# Altium PCB PCB - Copy.PcbDoc
Units mil, origin at the board's own origin, x right, y up, seen from the top; angles counter-clockwise.
Board outline 6023.62 x 2275.46 mil, 2 copper layers (Top Layer, Bottom Layer); 31 components, 24 nets, 110 pads, 29 vias.
Unrouted connection lines stored in the file: 18.
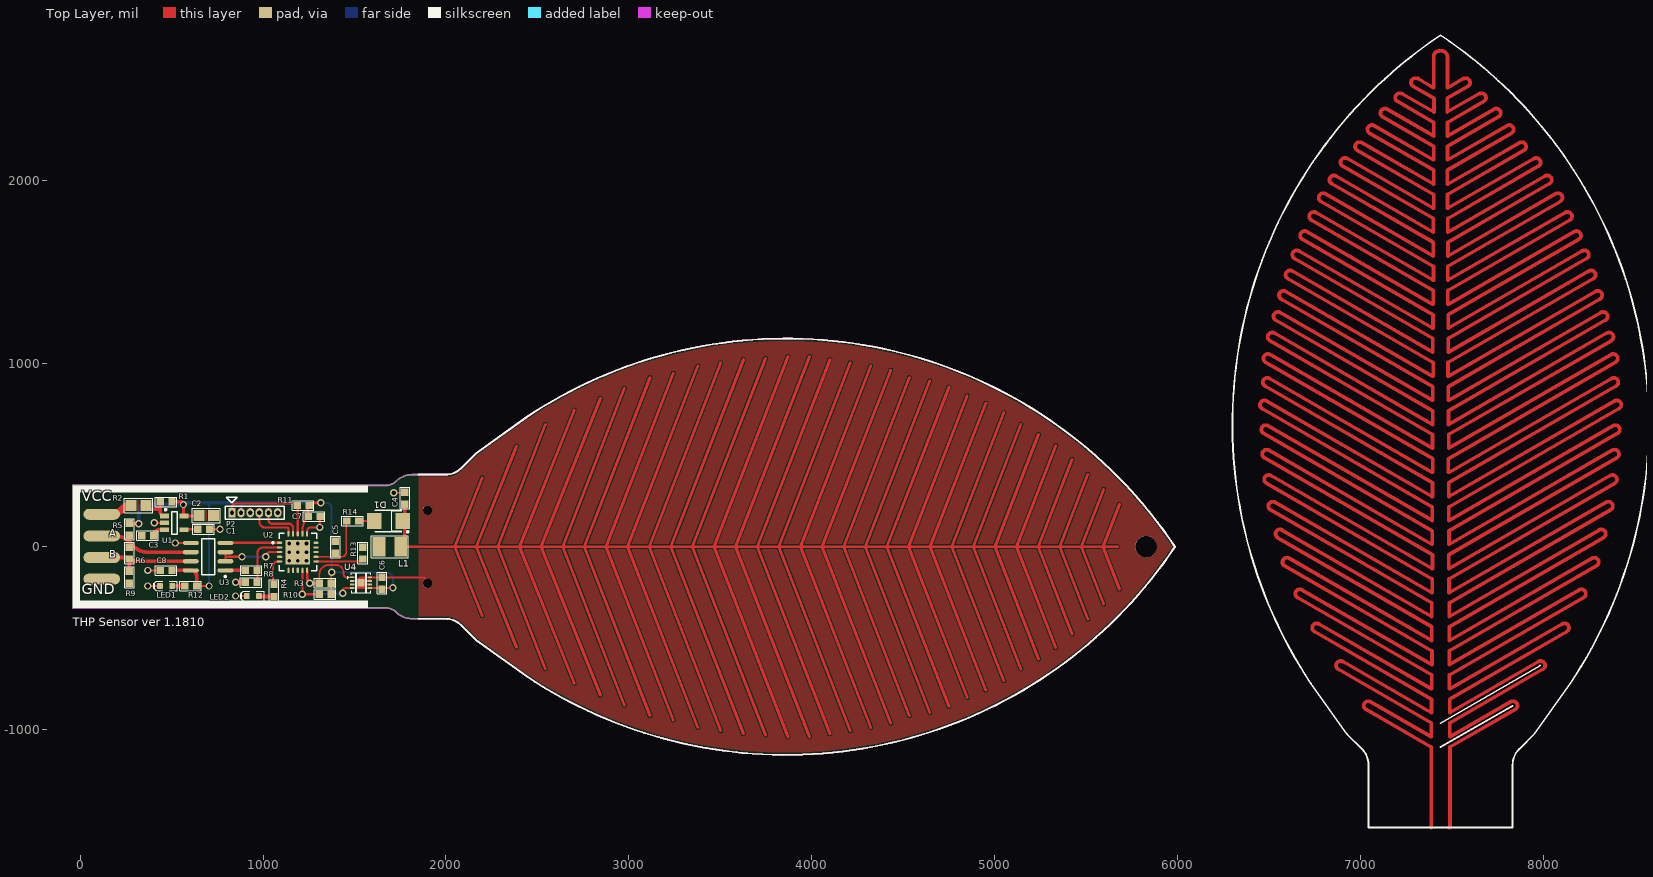
[diagram p0: Top Layer view]
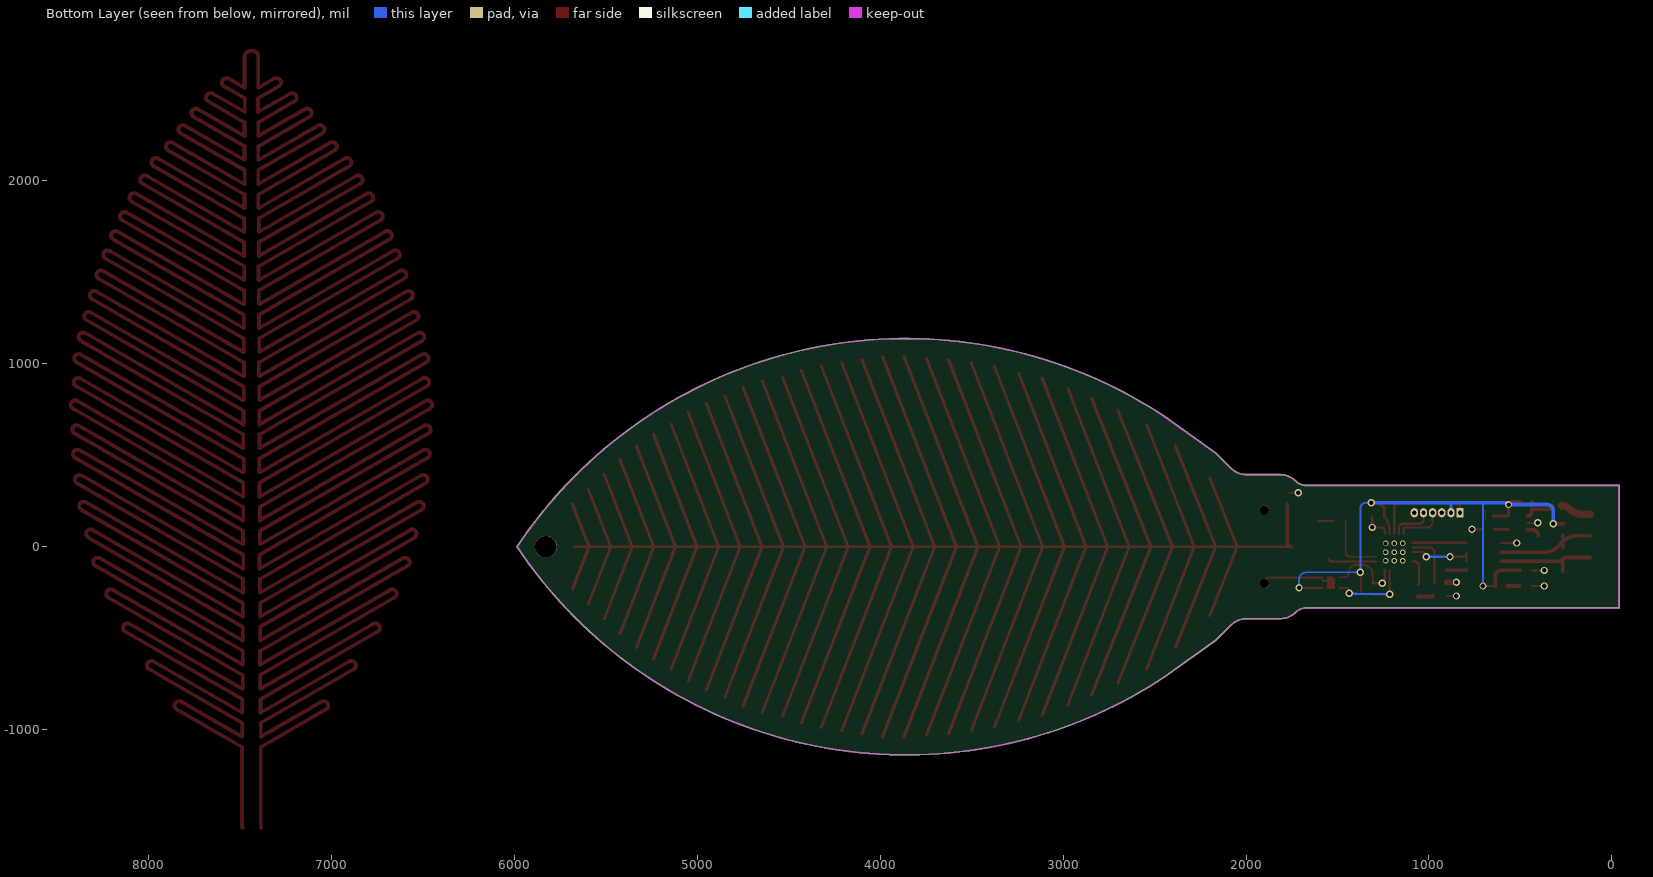
[diagram p1: Bottom Layer view, seen from below]

## Layer stack, top to bottom
Top Solder: solder mask 0.4, Solder Resist, Dk 3.5
Top Layer: signal copper 1.4
Dielectric1: dielectric 12.6, FR-4, Dk 4.8
Bottom Layer: signal copper 1.4
Bottom Solder: solder mask 0.4, Solder Resist, Dk 3.5

## Board outline
1576.71,-334.65 1671.13,-334.65 cw(c1671.13,-415.56) 1728.35,-358.35 ccw(c1813.7,-272.99) 1813.7,-393.7 1997.24,-393.7 cw(c1997.24,-514.41) 2082.6,-429.06 2165.35,-511.81 2440.94,-708.66 ccw(c3858.27,1417.32) 5984.25,0 ccw(c3858.27,-1417.32) 2440.94,708.66 2165.35,511.81 2082.6,429.06 cw(c1997.24,514.41) 1997.24,393.7 1813.7,393.7 ccw(c1813.7,272.99) 1728.35,358.35 cw(c1671.13,415.56) 1671.13,334.65 -39.37,334.65 -39.37,-334.65

## Design rules (kind name [scope] priority, off if disabled: settings)
Clearance [All] p1: gap=7 ignorepadtopadclearanceinfootprint=FALSE
ComponentClearance [All] p1 off: gap=10 collisioncheckmode=3 verticalgap=10 showdistances=FALSE
PlaneConnect [All] p1: planeconnectstyle=Direct reliefexpansion=20 reliefentries=4 reliefconductorwidth=10 reliefairgap=10
PolygonConnect [All] p1: connectstyle=Direct reliefconductorwidth=10 reliefentries=4 polygonreliefangle="90 Angle" airgapwidth=10
RoutingVias [All] p1: holewidth=25 width=40 viastyle="Through Hole" minholewidth=20 minwidth=35 maxholewidth=28 maxwidth=50
SolderMaskExpansion [All] p1: expansion=4
Width [All] p1: maxlimit=40 minlimit=10 preferedwidth=10
28 further rules are at their usual default settings.

## Classes and differential pairs
component class Sensor: C4 C5 C6 D1 L1 R13 R14 U4
component class MCU: C7 LED2 P2 R3 R4 R10 R11 U2
component class PowerSupply: C1 C2 C3 LED1 R1 R2 R12 U1
component class RS485: C8 R5 R6 R7 R8 R9 U3

## Components (designator, comment, footprint, x,y, rotation, side; value= is the part's Value field where it differs from the comment)
C1 "100nF" 0603 675,95.35 r180 top
C2 "2.2uF" 0805 690,170.35 r180 top value=100nF
C3 "100nF" 0603 370,60.35 r0 top
C4 "1nF" 0603 1775,265 r270 top
C5 "10nF" 0603 1395,-2.44 r270 top
C6 "100nF" 0603 1650,-200 r270 top
C7 "100nF" 0603 1280,165.35 r0 top
C8 "100nF" 0603 470,-129.65 r180 top
D1 "1N4148" D1810 1685,140 r180 top
L1 "1uH" 1210 1692.91,0 r0 top value=1.5µH
LED1 "RED" LED-0603-RED 470,-214.65 r180 top
LED2 "White" LED-0603-RED 945,-269.65 r180 top
P2 "Header 6" MHDR1X6 830,185.35 r0 top
R1 "dnp" 0603 470,245.35 r180 top value=1M
R2 "RTCC" 0805 319.25,225.04 r0 top
R3 "10k" 0603 1340,-199.65 r0 top value=1K
R4 "1k" 0603 1060,-239.65 r270 top value=1K
R5 "100k" 0603 269.69,95.04 r270 top value=4K7
R6 "dnp" 0603 269.69,-34.96 r270 top value=4K7
R7 "1k" 0603 935,-129.65 r180 top value=1M
R8 "dnp" 0603 935,-194.65 r0 top value=1M
R9 "100k" 0603 269.69,-167.52 r270 top value=4K7
R10 "10k" 0603 1340,-260 r0 top value=1K
R11 "10k" 0603 1220,225.35 r0 top value=1K
R12 "10k" 0603 605,-214.65 r0 top value=1M
R13 "150 1%" 0603 1545,-35 r90 top value=1M
R14 "1M" 0603 1490,140 r0 top
U1 "MIC5319-3.3" sot23-5 515,130.35 r270 top
U2 "PIC24F16KL401-I/MQ" QFN-MQ20_N 1190,-29.65 r0 top
U3 "ISL83485IBZ" SO8 700,-54.65 r180 top
U4 "SHT30" QFN50P250X250X100_HS-9N 1535.43,-196.85 r0 top

## Footprints (in the part's own frame and the unit in brackets; to place one, negate y for a bottom-side part, rotate by r counter-clockwise, add the part's x,y. Pads: shape width x height; smd on the part's side, far side on the other; paste and mask are expansions set on the pad)
0603 [mil]
  rect 40x40 smd: 1(-32.56,0) 2(32.56,0)
  silkscreen extent -59,-26 58,26, body extent -34,-19 34,19, height 51
0805 [mil]
  rect 60x60 smd: 1(-40.43,0) 2(40.43,0)
  Top Layer lines w0: 0,27 0,28 0,-28
  silkscreen extent -77,-40 77,40, body extent -42,-28 42,28, height 28
1210 [mil]
  rect 70x105 smd: 1(-59.75,0) 2(59.75,0)
  Top Layer pour cut-out: -23,53 22,53 22,-53 -23,-53
  silkscreen extent -101,-60 102,60, body extent -66,-52 66,52, height 35
D1810 [mil]
  rect 78.74x86.61 smd: 1(78,-0.5) 2(-78,0.5)
  silkscreen extent -111,-60 73,63, body extent -90,-54 95,52, height 35
LED-0603-RED [mm]
  round 0.254 on Mech15: 0(0,0)
  rrect25% 0.8x0.8 smd: A(-0.85,0) K(0.85,0)
  Top Layer pour cut-out: -0.5,0.5 0.5,0.5 0.5,-0.5 -0.5,-0.5
  silkscreen extent -1.55,-0.67 1.68,0.67, body extent -0.8,-0.4 0.8,0.4, height 0.75
MHDR1X6 [mil] "Connector; Header; 6 Position"
  rect 40x50 hole 23.62: 1(0,0)
  oval 40x50 hole 23.62: 2(50,0) 3(100,0) 4(150,0) 5(200,0) 6(250,0)
  silkscreen extent -35,-35 285,35
QFN50P250X250X100_HS-9N [mm] "QFN, 8-Leads, Body 2.50x2.50mm, Pitch 0.50mm, Thermal Pad 1.80x1.10mm, IPC Medium Density"
  rect 1x1 smd paste+0.1: 0(0,0)
  rect 0.65x0.25 smd paste+0.1: 1(-1.2,0.75) 2(-1.2,0.25) 3(-1.2,-0.25) 4(-1.2,-0.75) 5(1.2,-0.75) 6(1.2,-0.25) 7(1.2,0.25) 8(1.2,0.75)
  Top Layer region: 0.5,-0.85 0.5,0.85 -0.175,0.85 -0.5,0.525 -0.5,-0.85
  silkscreen extent -1.88,-1.37 1.38,1.38, body extent -1.3,-1.3 1.3,1.3, height 1
QFN-MQ20_N [mm] "QFN, 20-Leads, Body 5x5 mm, Pitch 0.65mm, IPC Medium Density"
  oval 0.75x0.3 smd: 1(-2.525,1.3) 2(-2.525,0.65) 3(-2.525,0) 4(-2.525,-0.65) 5(-2.525,-1.3) 11(2.525,-1.3) 12(2.525,-0.65) 13(2.525,0) 14(2.525,0.65) 15(2.525,1.3)
  oval 0.3x0.75 smd: 6(-1.3,-2.525) 7(-0.65,-2.525) 8(0,-2.525) 9(0.65,-2.525) 10(1.3,-2.525) 16(1.3,2.525) 17(0.65,2.525) 18(0,2.525) 19(-0.65,2.525) 20(-1.3,2.525)
  rect 3.4x3.4 smd: 21(0,0)
  silkscreen extent -3.57,-2.6 2.6,2.6, body extent -2.58,-2.58 2.58,2.58, height 1
SO8 [mm]
  oval 2.2x0.6 smd: 1(-2.4,1.905) 2(-2.4,0.635) 3(-2.4,-0.635) 4(-2.4,-1.905) 5(2.4,-1.905) 6(2.4,-0.635) 7(2.4,0.635) 8(2.4,1.905)
  silkscreen extent -2.53,-2.5 0.9,2.88, body extent -2,-2.5 2,2.5, height 1.75
sot23-5 [mm]
  rect 0.65x1.25 smd: 1(-0.95,-1.327) 2(0,-1.327) 3(0.95,-1.327) 4(0.95,1.327) 5(-0.95,1.327)
  silkscreen extent -1.95,-1.32 1.55,0.38, body extent -1.55,-0.9 1.55,0.9, height 1.45

## Part data
C1 C2 C3 C7 C8: library part "Cap Semi", "Capacitor (Semiconductor SIM Model)", LatestRevisionDate=29-May-2009, LatestRevisionNote="IPC-7351 Footprint Added.", PackageDescription="Chip Capacitor", PackageReference=C1206, Published=8-Jun-2000, Publisher="Altium Limited"
C4 C5 C6: library part C_0402, Manufacturer=AVX, Manufacturer Part Number=04023A101JAT2A, Supplier Part Number 1=1327622, ComponentLink1Description=http://www.avx.com/docs/Catalogs/ccog.pdf, ComponentLink1URL=http://www.avx.com/docs/Catalogs/ccog.pdf, Pricing 1="10=0,129, 100=0,099, 500=0,067, 1000=0,056, 5000=0,043 (EUR)", RoHS=YES, Stock 1=84696, Supplier 1=Farnell
D1: library part Diode, "Default Diode", Code_JEDEC=DO-214-AB, LatestRevisionDate=17-Jul-2002, LatestRevisionNote="Re-released for DXP Platform.", PackageDescription="DO-214-AB/SMC; 2 C-Bend Leads; Body 7.9 x 5.9 mm, inc. leads (LxW)", PackageReference=SMC, PackageVersion=Sep-1996, Published=8-Jun-2000, Publisher="Altium Limited"
L1: library part Inductor, "Inductor", Code_IEC=1005, Code_JEITA=0402, LatestRevisionDate=29-May-2009, LatestRevisionNote="IPC-7351 Footprint Added.", PackageDescription="Chip Inductor", PackageReference=0402-A, Published=8-Jun-2000, Publisher="Altium Limited"
LED1 LED2: library part SMD_LED_0805
P2: "Header, 6-Pin", LatestRevisionDate=17-Jul-2002, LatestRevisionNote="Re-released for DXP Platform.", Publisher="Altium Limited"
R1 R5 R6 R7 R8 R9 R12 R13 R14: library part "Res Semi", "Semiconductor Resistor", LatestRevisionDate=17-Jul-2002, LatestRevisionNote="Re-released for DXP Platform.", PackageReference=AXIAL-0.5, Published=8-Jun-2000, Publisher="Altium Limited"
R2: library part Ferritbeat, Manufacturer=MURATA, Manufacturer Part Number=BLM18EG471SN1D, Supplier Part Number 1=1515722, ComponentLink1Description=http://www.farnell.com/datasheets/5169.pdf, ComponentLink1URL=http://www.farnell.com/datasheets/5169.pdf, Pricing 1="5=0,196, 50=0,17, 100=0,14, 250=0,112, 500=0,101, 2000=0,092 (EUR)", RoHS=YES, Stock 1=11384, Supplier 1=Farnell
R3 R4 R10 R11: library part Res1, "Resistor", LatestRevisionDate=17-Jul-2002, LatestRevisionNote="Re-released for DXP Platform.", PackageReference=AXIAL-0.3, Published=8-Jun-2000, Publisher="Altium Limited"
U1: library part MIC5305
U2: library part PIC24F04KA201T-I/MQ, "General Purpose 16-Bit Flash Microcontroller with nanoWatt XLP Technology, 4KB Flash, 512 bytes SRAM, 20-Pin QFN, Industrial Temperature, Tape and Reel", Supplier Part Number 1=PIC24F04KA201T-I/MQ-ND, ComponentLink1Description=Datasheet, ComponentLink1URL=http://ww1.microchip.com/downloads/en/DeviceDoc/39937b.pdf, ComponentLink2Description="Packaging Specification", ComponentLink2URL=http://www.microchip.com/stellent/groups/techpub_sg/documents/packagingspec/en012702.pdf, ComponentLink3Description="Microchip.com Home", ComponentLink3URL=http://www.microchip.com/, DatasheetVersion="revB, May-2009", FirstPublished=2-Dec-2009, PackageDescription="20-Lead Plastic Quad Flat, No Lead Package (MQ) - 5x5x0.9 mm Body [QFN]", PackageReference=QFN-MQ20, PackageVersion="revBB, Aug-2009", Publisher="Altium Limited", Supplier 1=Digi-Key, Supplier 2=Newark, Supplier Part Number 2=08R2010
U3: library part SN75176AD, "Differential Bus Transceiver", Code_IPC=SOIC127P600-8, ComponentLink1Description="Manufacturer Link", ComponentLink1URL=http://www.ti.com/, ComponentLink2Description=Datasheet, ComponentLink2URL=http://www-s.ti.com/sc/ds/sn75176a.pdf, DatasheetVersion=Aug-1989, LatestRevisionDate=13-Apr-2006, LatestRevisionNote="IPC-7351 Footprint Added.", Note="Receiver Hysteresis of 50mV Typical", PackageDescription="8-Pin Small Outline Integrated Circuit 1.27 mm Pitch", PackageReference=D008, PackageVersion=Jan-1998, Published=15-May-2002, Publisher="Altium Limited"
U4: library part SHT3x

## Free pads (board coordinates)
  oval 200x60 smd paste+3.94: 1(118.11,-177.17) 1(118.11,-59.06) 1(118.11,59.06) 1(118.11,177.17)
  round 51.18 hole 51.18: ""(1900,-200) ""(1900,200)
  round 118.11 hole 118.11: ""(5826.77,0)

## Via types
v1: diameter 40, hole 25, Top Layer to Bottom Layer, 20 vias
v2: diameter 30, hole 20, Top Layer to Bottom Layer, tented top, 9 vias

## Nets (pads, with @x,y where several pads share a name; then routed paths per layer and width w, separated by ;. In a path a pad name is that pad's centre, name@x,y a point inside that pad or via, vN(x,y) a via of type N, cw(c..) or ccw(c..) an arc to the next point about the centre after c; other vN are vias at no path point)
GND: C1.1 C2.1 C3.1 C4.1 C5.1 C6.1 C7.2 C8.2 LED1.K LED2.K P2.3 pad. pad.1@118.11,-177.17 R8.1 R9.2 U1.2 U2.16 U2.21 U3.5 U4.0 U4.7 U4.8 | length 1018
  Top Layer w11: v1(370,-214.65) LED1.K ; v1(370,-129.65) 370,-134.65 cw(c375,-134.65) 375,-129.65 C8.2 ; v1(405,130.35) U1.2 ; v1(520,20.35) U3.5 ; C1.1 v1(765,95.35) ; v1(850,-269.65) LED2.K@901.54,-269.65 ; U2.16 1241.18,86.54 cw(c1260,86.54) 1260,105.35 v1(1310,105.35) ; v1@1310,115.35 1310,162.8 cw(c1312.56,162.8) C7.2 ; U4.0 cw(c1545.28,-196.85) 1545.28,-187.01 U4.7 U4.8 1867.32,-167.32 cw(c1867.32,-200) pad.@1900,-200
  Top Layer w30: v1(850,-194.65) R8.1
  Bottom Layer w11: v2(1237.24,-29.65) cw(c1246.89,-29.65) v2@1246.89,-20
  other v2: 1142.76,-76.89 1190,-76.89 1237.24,-76.89 1142.76,-29.65 1190,-29.65 1142.76,17.6 1190,17.6 1237.24,17.6
LED_DEBUG: R4.1 U2.5 | length 154.5
  Top Layer w12: R4.1 cw(c1060,-202.09) 1055,-202.09 1055,-104.65 cw(c1078.82,-104.65) 1078.82,-80.83 U2.5
MCU_PGC: P2.5 U2.19 | length 230.9
  Top Layer w12: P2.5 1030,145.35 ccw(c1050,145.35) 1050,125.35 1140,125.35 cw(c1140,100.94) 1164.41,100.94 U2.19
MCU_PGD: P2.4 U2.20 | length 257.7
  Top Layer w12: P2.4 980,135.35 ccw(c1010,135.35) 1010,105.35 1130,105.35 cw(c1130,96.54) 1138.82,96.54 U2.20
MCU_RESET: P2.1 R11.1 U2.18 | length 561.6
  Top Layer w12: P2.1 830,215.35 cw(c850,215.35) 850,235.35 1177.44,235.35 cw(c1177.44,225.35) R11.1 cw(c1187.44,222.8) 1190,222.8 U2.18
NetC1_2: C1.2 U1.4 | length 76.6
  Top Layer w15: U1.4 cw(c569.65,92.95) 569.65,95.35 C1.2
NetC3_2: C3.2 R1.2 R2.2 U1.1 U1.3 | length 268.6
  Top Layer w20: R2.2@340,205.35 437.44,205.35 ; C3.2 cw(c435.16,60.35) 435.16,92.95 U1.3 ; R1.2 437.44,205.35 ; 437.44,205.35 437.44,193.07 ccw(c462.76,193.07) U1.1@462.49,167.76 ; U1.1@462.49,167.76 ccw(c462.76,193.07) U1.1 U1.1@462.49,167.76
NetD1_1: D1.1 R14.2 | length 84.9
  Top Layer w10: R14.2 1522.56,140.5 D1.1
NetL1_1: L1.1 R13.2
NetLED1_A: LED1.A R12.1 | length 69
  Top Layer w20: LED1.A R12.1
NetLED2_A: LED2.A R4.2 | length 83
  Top Layer w20: LED2.A ccw(c981.02,-269.65) 981.02,-272.2 R4.2
NetR7_2: R7.2 U3.1 | length 108
  Top Layer w20: U3.1 R7.2
PulseOut: R13.1 U2.11 | length 263.2
  Top Layer w12: U2.11 1531.73,-80.83 ccw(c1531.73,-67.56) R13.1
RS485_A: pad.1@118.11,59.06 R5.2 R6.1 U3.6 | length 580.4
  Top Layer w20: pad.1@118.11,59.06 194.8,59.06 cw(c194.8,-40.94) 265.51,29.77 269.69,25.59 ; R6.1 269.69,25.59 ; R5.2 269.69,25.59 ; U3.6 366.34,-29.65 cw(c366.34,70.35) 295.63,-0.36 269.69,25.59
RS485_B: pad.1@118.11,-59.06 R6.2 R9.1 U3.7 | length 560.3
  Top Layer w20: pad.1@118.11,-59.06 249.25,-59.06 cw(c249.25,-87.96) R6.2 ; R9.1 R6.2 ; U3.7 298.96,-79.65 cw(c298.96,-38.24) R6.2
SCL: R10.1 U2.9 U4.4 | length 499
  Top Layer w10: v1(1435,-255) 1435,-240 cw(c1448.62,-240) 1448.62,-226.38 U4.4
  Top Layer w12: v1(1215,-259.65) v1@1215.59,-259.65 ; U2.9 v1@1215.59,-259.65 ; R10.1@1307.44,-259.65 v1@1215.59,-259.65
  Bottom Layer w12: v1(1215,-259.65) 1240.16,-259.65 1394.04,-257.21 1415.03,-256.88
SDA: R3.1 U2.10 U4.1 | length 433.7
  Top Layer w10: R3.1 1307.44,-151.7 cw(c1359.14,-151.7) 1359.14,-100 1400,-100 cw(c1400,-140) 1440,-140 1440,-150 ccw(c1457.32,-150) 1457.32,-167.32 U4.1
  Top Layer w12: U2.10 1241.18,-175.83 ccw(c1260,-175.83) v1@1256.13,-194.24 ; v1(1255,-199.65) R3.1
  Bottom Layer w12: v1@1250,-204.65 cw(c1255,-204.65) v1(1255,-199.65)
SENSOR_DR: U2.3 U3.2 U3.3 | length 359.9
  Top Layer w12: U3.2 U3.3 ; 795,-54.65 v1(885,-54.65) ; v1(1015,-54.65) cw(c1040,-54.65) 1040,-29.65 U2.3
  Bottom Layer w12: v1(885,-54.65) v1(1015,-54.65)
SENSOR_RX: U2.1 U3.4 | length 297.3
  Top Layer w12: U3.4 794.49,21.54 U2.1
SENSOR_TX: R7.1 R8.2 U2.2 | length 299.4
  Top Layer w12: R8.2 ccw(c967.56,-192.2) 970,-192.2 970,-34.65 cw(c1000.59,-34.65) 1000.59,-4.06 U2.2
SensorCap: C4.2 D1.2 L1.2 | length 56290.9
  Top Layer w15.75: L1.2 1752.81,0 2047.24,0 ; 2197.94,-376.73 2047.24,0 ; 2197.94,376.73 2047.24,0 ; 2385.28,-549.82 2165.35,0 ; 2385.28,549.82 2165.35,0 ; 2543.17,-667.81 2283.46,0 ; 2543.17,667.81 2283.46,0 ; 2700.24,-746.67 2401.57,0 ; 2700.24,746.67 2401.57,0 ; 2844.15,-811.16 2519.69,0 ; 2844.15,811.16 2519.69,0 ; 2974.34,-865.4 2637.8,0 ; 2974.34,865.4 2637.8,0 ; 3114.99,-923.35 2755.91,0 ; 3114.99,923.35 2755.91,0 ; 3242.33,-947.1 2874.02,0 ; 3242.33,947.1 2874.02,0 ; 3376.33,-987.95 2992.13,0 ; 3376.33,987.95 2992.13,0 ; 3501.09,-1005.05 3110.24,0 ; 3501.09,1005.05 3110.24,0 ; 3625.85,-1022.14 3228.35,0 ; 3625.85,1022.14 3228.35,0 ; 3746.54,-1028.79 3346.46,0 ; 3746.54,1028.79 3346.46,0 ; 3868.72,-1039.24 3464.57,0 ; 3868.72,1039.24 3464.57,0 ; 3986.83,-1039.24 3582.68,0 ; 3986.83,1039.24 3582.68,0 ; 4098.29,-1022.14 3700.79,0 ; 4098.29,1022.14 3700.79,0 ; 4209.75,-1005.05 3818.9,0 ; 4209.75,1005.05 3818.9,0 ; 4321.21,-987.95 3937.01,0 ; 4321.21,987.95 3937.01,0 ; 4430.08,-964.2 4055.12,0 ; 4430.08,964.2 4055.12,0 ; 4532.31,-923.35 4173.23,0 ; 4532.31,923.35 4173.23,0 ; 4643.77,-906.25 4291.34,0 ; 4643.77,906.25 4291.34,0 ; 4748.58,-872.05 4409.45,0 ; 4748.58,872.05 4409.45,0 ; 4848.22,-824.56 4527.56,0 ; 4848.22,824.56 4527.56,0 ; 4950.44,-783.71 4645.67,0 ; 4950.44,783.71 4645.67,0 ; 5048.61,-732.41 4763.78,0 ; 5048.61,732.41 4763.78,0 ; 5141.6,-667.81 4881.89,0 ; 5141.6,667.81 4881.89,0 ; 5238.65,-613.67 5000,0 ; 5238.65,613.67 5000,0 ; 5332.75,-551.92 5118.11,0 ; 5332.75,551.92 5118.11,0 ; 5421.67,-476.87 5236.22,0 ; 5421.67,476.87 5236.22,0 ; 5508.01,-395.18 5354.33,0 ; 5508.01,395.18 5354.33,0 ; 5594.35,-313.48 5472.44,0 ; 5594.35,313.48 5472.44,0 ; 5669.29,0 5590.55,0 ; 5680.69,-231.79 5590.55,0 ; 5680.69,231.79 5590.55,0 ; 2047.24,0 2165.35,0 ; 2165.35,0 2283.46,0 ; 2283.46,0 2401.57,0 ; 2401.57,0 2519.69,0 ; 2519.69,0 2637.8,0 ; 2637.8,0 2755.91,0 ; 2755.91,0 2874.02,0 ; 2874.02,0 2992.13,0 ; 2992.13,0 3110.24,0 ; 3110.24,0 3228.35,0 ; 3228.35,0 3346.46,0 ; 3346.46,0 3464.57,0 ; 3464.57,0 3582.68,0 ; 3582.68,0 3700.79,0 ; 3700.79,0 3818.9,0 ; 3818.9,0 3937.01,0 ; 3937.01,0 4055.12,0 ; 4055.12,0 4173.23,0 ; 4173.23,0 4291.34,0 ; 4291.34,0 4409.45,0 ; 4409.45,0 4527.56,0 ; 4527.56,0 4645.67,0 ; 4645.67,0 4763.78,0 ; 4763.78,0 4881.89,0 ; 4881.89,0 5000,0 ; 5000,0 5118.11,0 ; 5118.11,0 5236.22,0 ; 5236.22,0 5354.33,0 ; 5354.33,0 5472.44,0 ; 5472.44,0 5590.55,0
  Top Layer w20: L1.2 ccw(c1752.66,22.34) 1752.81,0 ccw(c1752.66,22.34) 1775,22.34 C4.2
SM_VoltageIn: C5.2 R14.1 U2.12 | length 351.4
  Top Layer w10: U2.12 1429.76,-55.24 ccw(c1429.76,-30) 1455,-30 1455,137.56 cw(c1457.44,137.56) R14.1
V+3.3: C2.2 C6.2 C7.1 C8.1 P2.2 R1.1 R3.2 R5.1 R10.2 R11.2 R12.2 U1.5 U2.17 U3.8 U4.5 | length 3451.8
  Top Layer w10: R12.2 637.56,-215 v1(705,-215) ; R10.2 R3.2 1372.56,-142.44 cw(c1375,-142.44) v1(1375,-140) ; U4.5 1708.62,-226.38 ccw(c1708.62,-225) v1(1710,-225)
  Top Layer w11: U2.17 1215.59,92.08 cw(c1315.59,92.08) 1244.88,162.79 C7.1
  Top Layer w15: v1(565,230.35) 565,175.51 570,170.51 cw(c567.24,170.51) U1.5 646.97,167.76 ccw(c646.97,170.35) C2.2 ; C7.1@1244.88,162.79 1244.88,206.82 cw(c1263.42,206.82) 1263.42,225.35 1278.42,240.35 v1(1315,240.35)
  Top Layer w20: R5.1@267.44,125.35 v1(320,125.35) ; C8.1 U3.8 cw(c605.51,-161.69) 637.56,-161.69 R12.2 ; R1.1 550,245.35 cw(c550,230.35) v1(565,230.35)
  Bottom Layer w10: v1(705,-215) 705,235.35 ; v1(1315,240.35) 1315,240 1345,240 cw(c1345,210) 1375,210 v1(1375,-140) 1670,-140 cw(c1670,-180) 1710,-180 v1(1710,-225)
  Bottom Layer w15: P2.2 880,240.35
  Bottom Layer w20: v1(320,125.35) 320,195.35 cw(c355,195.35) 355,230.35 v1(565,230.35) cw(c575,230.35) 575,240.35 710,240.35 ; 705,235.35 cw(c710,235.35) 710,240.35 ; v1@1300,240.35 880,240.35 710,240.35
V+IN: pad.1@118.11,177.17 R2.1 | length 173.5
  Top Layer w40: pad.1@118.11,177.17 163.24,177.17 ccw(c163.24,270.28) 229.08,204.44 cw(c278.82,154.7) R2.1
pads on no net: LED1.0 LED2.0 P2.6 U2.4 U2.6 U2.7 U2.8 U2.13 U2.14 U2.15 U4.2 U4.3 U4.6
copper on no net: | length 94866.1
  Top Layer w10: v1(1715,295) 1770,295
  Top Layer w20: 6459.87,754.77 7390.42,217.52 7390.42,142.54 ; 6460,755 cw(c6471.75,775.35) 6451.4,787.11 cw(c6473.05,774.61) 6485.55,796.26 ; 6487.13,795.03 7388.81,274.45 ; 6504.8,1049.97 ccw(c6492.3,1028.32) 6470.65,1040.82 ccw(c6491.01,1029.07) 6479.26,1008.71 7393.3,480.99 7393.3,406.01 ; 6510.85,1046.48 7391.69,537.93 7391.69,612.9 6502.76,1126.13 cw(c6514.52,1146.48) 6494.16,1158.23 cw(c6515.81,1145.73) 6528.31,1167.38 7390.08,669.84 ; 6544.42,49 7387.71,-437.87 7387.71,-512.85 6608.78,-63.14 ccw(c6596.28,-84.79) 6574.63,-72.29 ccw(c6594.99,-84.04) 6583.24,-104.4 7389.32,-569.79 7389.32,-644.77 6675.69,-235.08 ; 6545,50 cw(c6556.75,70.35) 6536.4,82.11 cw(c6558.05,69.61) 6570.55,91.26 ; 6569.97,90.26 7386.1,-380.94 ; 6679.08,-236.29 ccw(c6666.58,-257.94) 6644.93,-245.44 ccw(c6665.28,-257.19) 6653.53,-277.55 7387.88,-701.53 7387.88,-776.5 ; 6900.47,2080 cw(c6912.22,2100.35) 6891.87,2112.11 cw(c6913.52,2099.61) 6926.02,2121.26 7394.78,1850.62 ; 6902.28,2078.95 7396.39,1793.68 7396.39,1718.7 ; 7224.94,2475.21 ccw(c7212.44,2453.56) 7190.79,2466.06 ccw(c7211.15,2454.31) 7199.4,2433.95 7398.38,2319.07 7398.38,2244.09 ; 7227.67,2474.66 7399.82,2375.83 7399.82,2450.81 7285.91,2516.57 cw(c7297.66,2536.93) 7277.31,2548.68 cw(c7298.96,2536.18) 7311.46,2557.83 ; 7312.03,2558.8 7398.21,2507.74 7398.21,2678.21 cw(c7430,2678.21) 7430,2710 7440,2710 cw(c7440,2676.56) 7473.44,2676.56 7473.44,2507.74 7559.62,2558.8 ; 7384.11,-906.33 6901.52,-627.7 ccw(c6889.02,-649.35) 6867.37,-636.85 ccw(c6887.72,-648.6) 6875.97,-668.96 7385.72,-963.26 7385.72,-1038.24 7384.72,-1039.24 7052.95,-847.7 ccw(c7040.45,-869.35) 7018.8,-856.85 ccw(c7039.16,-868.6) 7027.41,-888.96 7384.28,-1095 7384.28,-1534.28 ccw(c7385,-1534.28) 7385,-1535 ; 7384.83,-776.33 6771.45,-422.19 ccw(c6758.95,-443.84) 6737.29,-431.34 ccw(c6757.65,-443.09) 6745.9,-463.45 7386.44,-833.26 7386.44,-908.24 ; 7386.82,-250.94 6531.49,242.89 ccw(c6518.99,221.24) 6497.34,233.74 ccw(c6517.69,221.99) 6505.94,201.63 7388.43,-307.87 7388.43,-382.85 ; 7388.09,144.45 6493.32,661.05 ccw(c6480.82,639.4) 6459.16,651.9 ccw(c6479.52,640.15) 6467.77,619.79 7389.7,87.52 7389.7,12.54 6498.22,527.23 ccw(c6485.72,505.58) 6464.07,518.08 ccw(c6484.43,506.33) 6472.68,485.97 7391.31,-44.4 7391.31,-119.38 ; 7388.26,-119.2 6508.94,388.47 ccw(c6496.44,366.82) 6474.79,379.32 ccw(c6495.15,367.57) 6483.39,347.22 7389.87,-176.14 7389.87,-251.11 ; 7390.25,406.19 6501.53,919.29 ccw(c6489.03,897.64) 6467.38,910.14 ccw(c6487.73,898.39) 6475.98,878.04 7391.86,349.25 7391.86,274.27 ; 7390.8,799.84 6559.65,1279.7 ccw(c6547.15,1258.05) 6525.5,1270.55 ccw(c6545.86,1258.8) 6534.1,1238.45 7392.41,742.9 7392.41,667.93 ; 7392.07,1195.23 6662.7,1616.33 ccw(c6650.2,1594.68) 6628.55,1607.18 ccw(c6648.91,1595.43) 6637.16,1575.07 7393.68,1138.29 7393.68,1063.31 6625.78,1506.66 ccw(c6613.28,1485.01) 6591.63,1497.51 ccw(c6611.98,1485.76) 6600.23,1465.4 7395.29,1006.38 7395.29,931.4 ; 7392.24,931.58 6589.76,1394.89 ccw(c6577.26,1373.24) 6555.61,1385.74 ccw(c6575.96,1373.99) 6564.21,1353.63 7393.85,874.64 7393.85,799.66 ; 7392.79,1325.23 6705.87,1721.82 ccw(c6693.37,1700.17) 6671.72,1712.67 ccw(c6692.08,1700.92) 6680.33,1680.56 7394.4,1268.29 7394.4,1193.31 ; 7394.06,1720.62 6865.33,2025.88 ccw(c6852.83,2004.23) 6831.18,2016.73 ccw(c6851.53,2004.98) 6839.78,1984.62 7395.67,1663.68 7395.67,1588.7 6806.91,1928.62 ccw(c6794.41,1906.97) 6772.76,1919.47 ccw(c6793.12,1907.72) 6781.37,1887.36 7397.28,1531.77 7397.28,1456.79 ; 7394.23,1456.97 6754.6,1826.26 ccw(c6742.1,1804.61) 6720.45,1817.11 ccw(c6740.8,1805.35) 6729.05,1785 7395.84,1400.03 7395.84,1325.05 ; 7396.05,2246.01 7144.47,2391.26 ccw(c7131.97,2369.61) 7110.32,2382.11 ccw(c7130.67,2370.35) 7118.92,2350 7397.66,2189.07 7397.66,2114.09 7073.48,2301.26 ccw(c7060.98,2279.61) 7039.33,2292.11 ccw(c7059.68,2280.35) 7047.93,2260 7399.27,2057.16 7399.27,1982.18 ; 7396.22,1982.35 7005.55,2207.91 ccw(c6993.05,2186.26) 6971.4,2198.76 ccw(c6991.75,2187.01) 6980,2166.65 7397.83,1925.42 7397.83,1850.44 ; 7472.39,1982.18 7472.39,2057.16 7823.72,2260 ccw(c7811.97,2280.35) 7832.32,2292.11 ccw(c7810.67,2279.61) 7798.17,2301.26 7473.99,2114.09 7473.99,2189.07 7752.73,2350 ccw(c7740.98,2370.35) 7761.33,2382.11 ccw(c7739.68,2369.61) 7727.18,2391.26 7475.6,2246.01 ; 7473.28,2244.09 7473.28,2319.07 7672.26,2433.95 ccw(c7660.51,2454.31) 7680.86,2466.06 ccw(c7659.21,2453.56) 7646.71,2475.21 ; 7473.83,1850.44 7473.83,1925.42 7891.65,2166.65 ccw(c7879.9,2187.01) 7900.26,2198.76 ccw(c7878.61,2186.26) 7866.11,2207.91 7475.43,1982.35 ; 7474.38,1456.79 7474.38,1531.77 8090.29,1887.36 ccw(c8078.54,1907.72) 8098.89,1919.47 ccw(c8077.24,1906.97) 8064.74,1928.62 7475.98,1588.7 7475.98,1663.68 8031.87,1984.62 ccw(c8020.12,2004.98) 8040.47,2016.73 ccw(c8018.82,2004.23) 8006.32,2025.88 7477.59,1720.62 ; 7475.27,1718.7 7475.27,1793.68 7969.37,2078.95 ; 7475.82,1325.05 7475.82,1400.03 8142.6,1785 ccw(c8130.85,1805.35) 8151.21,1817.11 ccw(c8129.56,1804.61) 8117.06,1826.26 7477.42,1456.97 ; 7476.37,931.4 7476.37,1006.38 8271.42,1465.4 ccw(c8259.67,1485.76) 8280.02,1497.51 ccw(c8258.37,1485.01) 8245.87,1506.66 7477.97,1063.31 7477.97,1138.29 8234.5,1575.07 ccw(c8222.75,1595.43) 8243.1,1607.18 ccw(c8221.45,1594.68) 8208.95,1616.33 7479.58,1195.23 ; 7476.87,1850.62 7945.64,2121.26 cw(c7958.14,2099.61) 7979.79,2112.11 cw(c7959.43,2100.35) 7971.18,2080 ; 7477.26,1193.31 7477.26,1268.29 8191.33,1680.56 ccw(c8179.58,1700.92) 8199.93,1712.67 ccw(c8178.28,1700.17) 8165.78,1721.82 7478.86,1325.23 ; 7477.81,799.66 7477.81,874.64 8307.44,1353.63 ccw(c8295.69,1373.99) 8316.05,1385.74 ccw(c8294.4,1373.24) 8281.9,1394.89 7479.41,931.58 ; 7478.36,406.01 7478.36,480.99 8392.4,1008.71 ccw(c8380.65,1029.07) 8401,1040.82 ccw(c8379.35,1028.32) 8366.85,1049.97 ; 7479.25,667.93 7479.25,742.9 8337.55,1238.45 ccw(c8325.8,1258.8) 8346.15,1270.55 ccw(c8324.5,1258.05) 8312,1279.7 7480.85,799.84 ; 7479.8,274.27 7479.8,349.25 8395.67,878.04 ccw(c8383.92,898.39) 8404.28,910.14 ccw(c8382.63,897.64) 8370.13,919.29 7481.4,406.19 ; 7480.35,-119.38 7480.35,-44.4 8398.98,485.97 ccw(c8387.23,506.33) 8407.58,518.08 ccw(c8385.93,505.58) 8373.43,527.23 7481.95,12.54 7481.95,87.52 8403.89,619.79 ccw(c8392.13,640.15) 8412.49,651.9 ccw(c8390.84,639.4) 8378.34,661.05 7483.56,144.45 ; 7481.23,142.54 7481.23,217.52 8411.79,754.77 ; 7481.57,669.84 8343.34,1167.38 cw(c8355.84,1145.73) 8377.49,1158.23 cw(c8357.14,1146.48) 8368.89,1126.13 7479.96,612.9 7479.96,537.93 8360.8,1046.48 ; 7481.79,-251.11 7481.79,-176.14 8388.26,347.22 ccw(c8376.51,367.57) 8396.86,379.32 ccw(c8375.21,366.82) 8362.71,388.47 7483.39,-119.2 ; 7482.84,274.45 8384.52,795.03 ; 7483.22,-382.85 7483.22,-307.87 8365.71,201.63 ccw(c8353.96,221.99) 8374.32,233.74 ccw(c8352.66,221.24) 8340.16,242.89 7484.83,-250.94 ; 7483.77,-776.5 7483.77,-701.53 8218.12,-277.55 ccw(c8206.37,-257.19) 8226.73,-245.44 ccw(c8205.08,-257.94) 8192.58,-236.29 ; 7485,-1535 ccw(c7485,-1532.63) 7487.37,-1532.63 7487.37,-1095 7844.25,-888.96 ccw(c7832.5,-868.6) 7852.85,-856.85 ccw(c7831.2,-869.35) 7818.7,-847.7 7486.94,-1039.24 7485.93,-1038.24 7485.93,-963.26 7995.68,-668.96 ccw(c7983.93,-648.6) 8004.29,-636.85 ccw(c7982.64,-649.35) 7970.14,-627.7 7487.54,-906.33 ; 7485.21,-908.24 7485.21,-833.26 8125.76,-463.45 ccw(c8114,-443.09) 8134.36,-431.34 ccw(c8112.71,-443.84) 8100.21,-422.19 7486.82,-776.33 ; 7485.55,-380.94 8301.68,90.26 ; 7560.2,2557.83 cw(c7572.7,2536.18) 7594.35,2548.68 cw(c7573.99,2536.93) 7585.75,2516.57 7471.84,2450.81 7471.84,2375.83 7643.98,2474.66 ; 8195.96,-235.08 7482.34,-644.77 7482.34,-569.79 8288.42,-104.4 ccw(c8276.67,-84.04) 8297.02,-72.29 ccw(c8275.37,-84.79) 8262.87,-63.14 7483.94,-512.85 7483.94,-437.87 8327.23,49 ; 8301.11,91.26 cw(c8313.61,69.61) 8335.26,82.11 cw(c8314.9,70.35) 8326.65,50 ; 8386.11,796.26 cw(c8398.61,774.61) 8420.26,787.11 cw(c8399.9,775.35) 8411.65,755

## Polygon pours and split planes (outlines as drawn)
GND on Top Layer "GND_L01_P000" (solid, remove dead copper, pour order 0): 1850.39,393.7 2992.13,1082.68 4055.12,1141.73 5255.91,885.83 5984.25,0 5393.7,-748.03 4468.5,-1082.68 3543.31,-1200.79 2244.09,-688.98 1850.39,-393.7

## Keep-outs
Keep-Out Layer:
  lines w10: -39.37,-334.65 -39.37,0 -39.37,334.65 1576.71,334.65 1671.13,334.65 ccw(c1671.13,415.56) 1728.35,358.35 cw(c1813.7,272.99) 1813.7,393.7 1850,393.7 1997.24,393.7 ccw(c1997.24,514.41) 2082.6,429.06 2165.35,511.81 2440.94,708.66 cw(c3858.27,-1417.32) 5984.25,0 cw(c3858.27,1417.32) 2440.94,-708.66 2165.35,-511.81 2082.6,-429.06 ccw(c1997.24,-514.41) 1997.24,-393.7 1850,-393.7 1813.7,-393.7 cw(c1813.7,-272.99) 1728.35,-358.35 ccw(c1671.13,-415.56) 1671.13,-334.65 1576.71,-334.65 -39.37,-334.65

## Silkscreen, mask and mechanical layers (free items; w line width, h text height)
Top Overlay:
  region: 1566.93,-250.98 1566.93,-141.73 1556.93,-141.73 1556.93,-250.98
  region: 1513.94,-249.02 1513.94,-142.72 1503.94,-142.72 1503.94,-249.02
  rectangle: -39.37,295.28 1574.8,334.65
  rectangle: -39.37,-334.65 1574.8,-295.28
  rectangle: -39.37,-334.65 0,334.65
  lines w7: 800,270 830,240 860,270 800,270
  lines w10: 1850,-393.7 1997.24,-393.7 cw(c1997.24,-514.41) 2082.6,-429.06 2165.35,-511.81 2440.94,-708.66 ccw(c3858.27,1417.32) 5984.25,0 ccw(c3858.27,-1417.32) 2440.94,708.66 2165.35,511.81 2082.6,429.06 cw(c1997.24,514.41) 1997.24,393.7 1850,393.7 ; 7435,-1095 7830,-870 ; 7435,-965 7980,-650 ; 6727.17,-748.03 cw(c8853.15,669.29) 7435.83,2795.28 cw(c6018.5,669.29) 8144.49,-748.03 7947.64,-1023.62 7864.88,-1106.38 ccw(c7950.24,-1191.73) 7829.53,-1191.73 7829.53,-1535.43 7042.13,-1535.43 7042.13,-1191.73 ccw(c6921.42,-1191.73) 7006.77,-1106.38 6924.02,-1023.62 6727.17,-748.03
  text "VCC" at 10,230 h100
  text "A" at 160,40 h70
  text "B" at 160,-75 h70
  text "GND" at 10,-280 h100
  text "THP Sensor ver 1.1810" at -40,-450 h80
Bottom Solder:
  region: 1594.49,-248.97 1594.49,-145.03 1474.49,-145.03 1474.49,-248.97